# Altium PCB INA282.PcbDoc
Units mil, origin at the board's own origin, x right, y up, seen from the top; angles counter-clockwise.
Board outline 6000 x 4000 mil, 2 copper layers (Top Layer, Bottom Layer); 8 components, 13 nets, 27 pads, 4 vias.
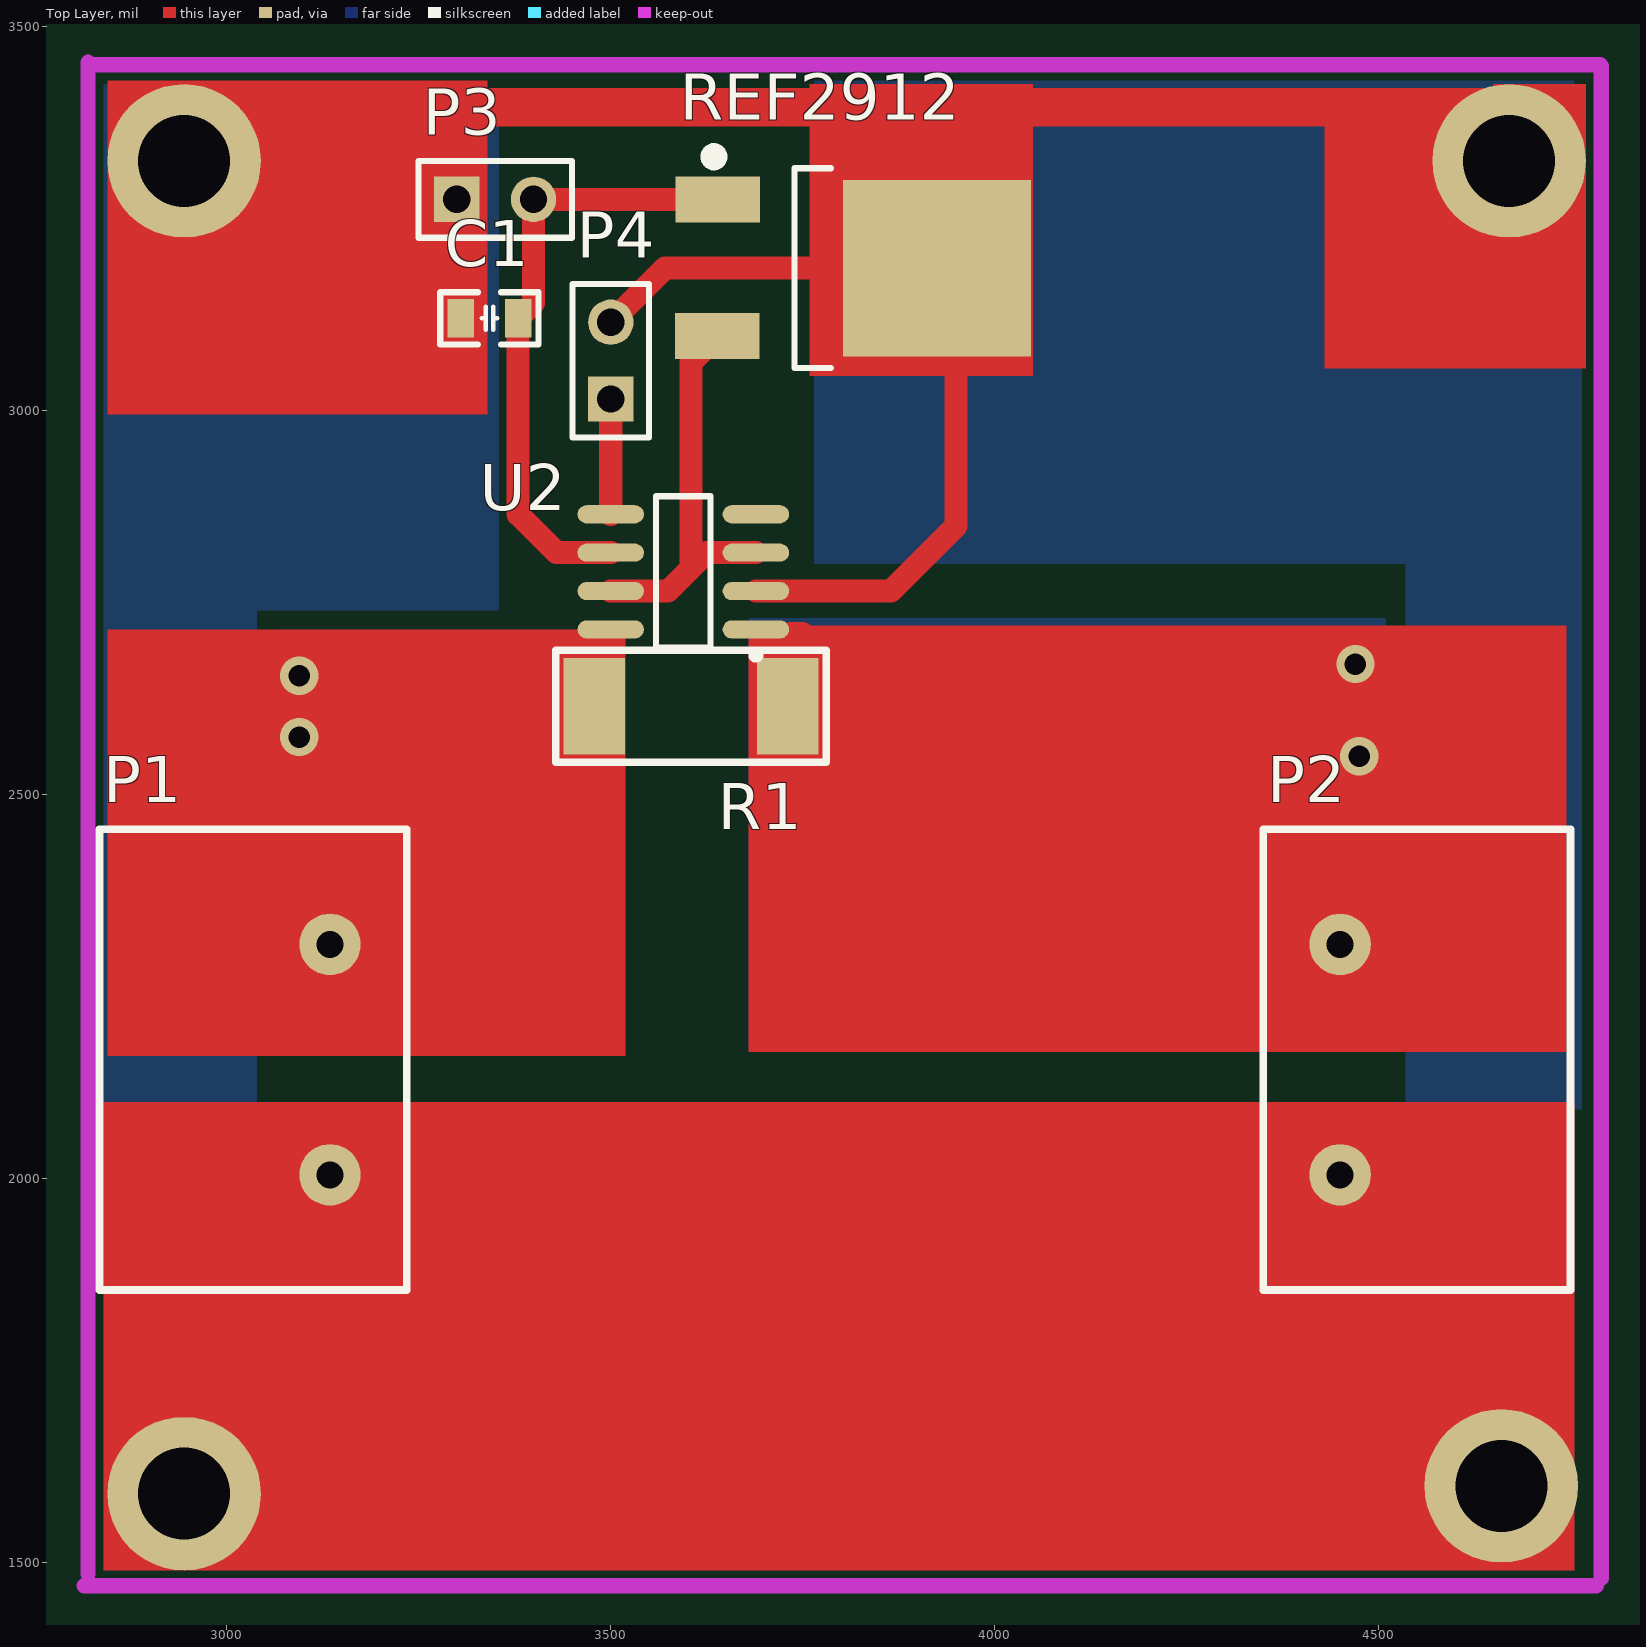
[diagram p0: Top Layer view]
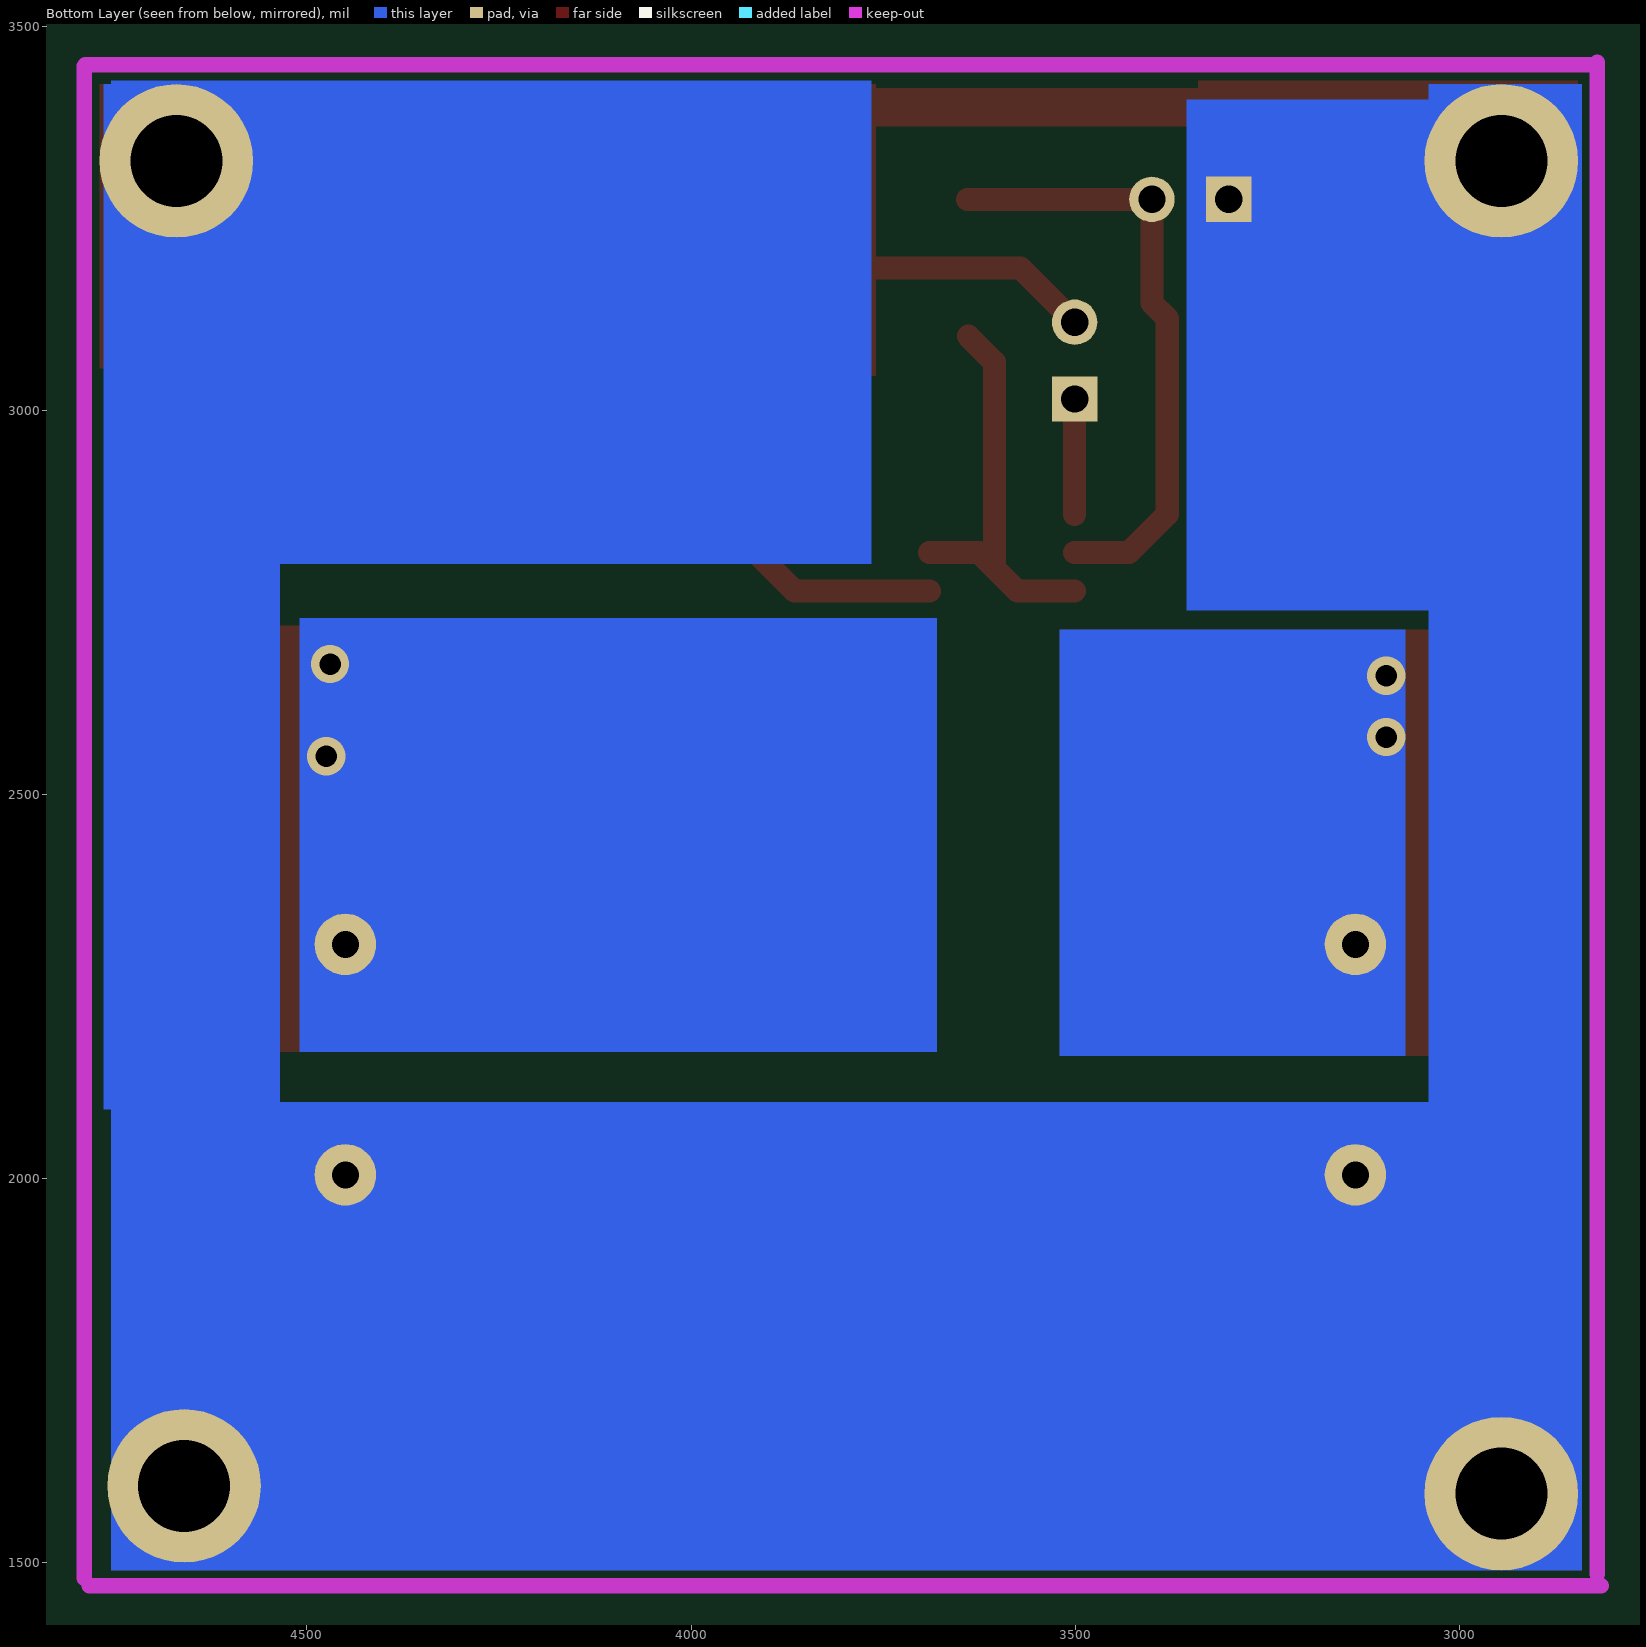
[diagram p1: Bottom Layer view, seen from below]

## Layer stack, top to bottom
Top Solder: solder mask 0.4, Solder Resist, Dk 3.5
Top Layer: signal copper 1.4
Dielectric 1: dielectric 12.6, FR-4, Dk 4.8
Bottom Layer: signal copper 1.4
Bottom Solder: solder mask 0.4, Solder Resist, Dk 3.5

## Board outline
1000,1000 7000,1000 7000,5000 1000,5000

## Design rules (kind name [scope] priority, off if disabled: settings)
Clearance [All] p1: gap=10 ignorepadtopadclearanceinfootprint=FALSE except(0: Arc-Hole Track-Hole SMDPad-Hole THPad-Hole Via-Hole Fill-Hole Poly-Hole Region-Hole Text-Hole)
PolygonConnect [All] p1: connectstyle=Relief reliefconductorwidth=10 reliefentries=4 polygonreliefangle="90 Angle" airgapwidth=10
RoutingVias [All] p1: holewidth=28 width=50 viastyle="Through Hole" minholewidth=28 minwidth=50 maxholewidth=28 maxwidth=50
SolderMaskExpansion [All] p1: expansion=4
Width [All] p1: maxlimit=100 minlimit=10 preferedwidth=50 toplayer_minwidth=30 minimp=50.000000 maximp=50.000000 favimp=50.000000
30 further rules are at their usual default settings.

## Classes and differential pairs
component class INA282: P2 P3 R1 U2

## Components (designator, comment, footprint, x,y, rotation, side; value= is the part's Value field where it differs from the comment)
C1 "Comment" "C 0805_L" 3342.6,3120 r180 top
P1 "Header 2" 2P 3035,2155 r270 top
P2 "Header 2" 2P 4550,2155 r90 top (schematic designator P1)
P3 "Header 2" HDR1X2 3300,3275 r0 top
P4 "Comment" HDR1X2 3500.51,3015 r90 top
R1 "Res2" "R 2512-HP_M" 3605,2615 r180 top value=0.1
REF2912 "Comment" TO252 3759.77,3185.45 r270 top
U2 "INA282" SO8_N 3595,2790 r180 top

## Footprints (in the part's own frame and the unit in brackets; to place one, negate y for a bottom-side part, rotate by r counter-clockwise, add the part's x,y. Pads: shape width x height; smd on the part's side, far side on the other; paste and mask are expansions set on the pad)
2P [mil]
  round 80 hole 35: 1(-150,100) 2(150,100)
  silkscreen extent -300,-200 300,200
"C 0805_L" [mil] "无极性贴片电容"
  rect 35x50 smd: 1(-37.4,0) 2(37.4,0)
  silkscreen extent -64,-34 64,34, body extent -39,-24 39,24, height 20
HDR1X2 [mm] "Connector; Header; 2 Position"
  rect 1.5x1.5 hole 0.9: 1(0,0)
  round 1.5 hole 0.9: 2(2.54,0)
  silkscreen extent -1.27,-1.27 3.81,1.27
"R 2512-HP_M" [mm] "1W高精度贴片电阻"
  rect 2.032x3.2 smd: 1(-3.2,0) 2(3.2,0)
  silkscreen extent -4.47,-1.85 4.47,1.85, body extent -3.2,-1.6 3.2,1.6, height 0.55
SO8_N [mm] "SOIC, 8-Leads, Body 4.9x3.9mm, Pitch 1.27mm, IPC Medium Density"
  oval 2.2x0.6 smd: 1(-2.4,1.905) 2(-2.4,0.635) 3(-2.4,-0.635) 4(-2.4,-1.905) 5(2.4,-1.905) 6(2.4,-0.635) 7(2.4,0.635) 8(2.4,1.905)
  silkscreen extent -2.53,-2.5 0.9,2.88, body extent -2,-2.5 2,2.5, height 1.75
TO252 [mil] "252晶体管"
  rect 60x110 smd: 1(-89.55,-119.77) 3(88.45,-120.77)
  rect 230x245 smd: 2(0,165.35)
  silkscreen extent -153,-133 130,28, body extent -128,-120 128,251, height 91

## Part data
P1 P2 P3: "Header, 2-Pin"
  P3: LatestRevisionDate=17-Jul-2002, LatestRevisionNote="Re-released for DXP Platform.", Publisher="Altium Limited"
R1: "Resistor", LatestRevisionDate=17-Jul-2002, LatestRevisionNote="Re-released for DXP Platform.", PackageDescription="Axial Device, Thru-Hole; 2 Leads; 0.4 in Pin Spacing", PackageReference=AXIAL-0.4, Published=8-Jun-2000, Publisher="Altium Limited"

## Free pads (board coordinates)
  round 200 hole 120: 2(2945,1590) 2(2945,3325) 2(4660,1600) 2(4670,3325)

## Via types
v1: diameter 50, hole 28, Top Layer to Bottom Layer, 4 vias

## Nets (pads, with @x,y where several pads share a name; then routed paths per layer and width w, separated by ;. In a path a pad name is that pad's centre, name@x,y a point inside that pad or via, vN(x,y) a via of type N, cw(c..) or ccw(c..) an arc to the next point about the centre after c; other vN are vias at no path point)
GND: C1.2 P1.2 P2.1 P3.1 P4.2 pad.2 REF2912.2 U2.2 | length 2452.7
  Top Layer w30: 3315,3025 3315,3235 ; P4.2 3570.96,3185.45 REF2912.2 ; U2.2 3865,2765 3950,2850 3950,3055 ; 4475,3325 4555,3245
  Top Layer w50: 3280,3395 4455,3395
ISI: 
NetC2_1: 
NetC3_2: 
NetC4_2: 
NetR2_2: 
NetR4_1: 
NetR5_1: 
REF: REF2912.3 U2.3 U2.7 | length 525.8
  Top Layer w30: U2.7 3575,2765 3605,2795 ; REF2912.3 3605,3063 3605,2795 ; U2.3 3625,2815 3605,2795
V: P4.1 U2.5 | length 150
  Top Layer w30: U2.5 P4.1
VCC: C1.1 P3.2 REF2912.1 U2.6 | length 799.5
  Top Layer w30: U2.6 3430,2815 3380,2865 C1.1 3400,3140 P3.2 REF2912.1
VIN: P1.1 R1.2 U2.8
  other v1: 3095,2575 3095,2655
VOUT: P2.2 R1.1 U2.1 | length 29.7
  Top Layer w30: 3734.49,2710 3750,2710 ; 4550,2605 4560,2595
  other v1: 4475,2550 4470,2670
pads on no net: U2.4

## Keep-outs
Keep-Out Layer:
  lines w20: 2815,1470 4783.5,1470 ; 2820,1485 2820,3453.5 ; 2820,3450 4788.5,3450 ; 4790,1480 4790,3448.5

## Other copper
Top Layer:
  rectangle net GND: 3759.49,3045 4050,3425
  rectangle net GND: 2845,2995 3340,3430
  rectangle net GND: 4510,3055 4680,3180
  rectangle net GND: 4430,3055 4680,3420
  rectangle net GND: 4650,3055 4770,3425
  rectangle net GND: 2840,1490 4755,2100
  rectangle net VIN: 2845,2160 3520,2715
  rectangle net VOUT: 3680,2165 4745,2720
Bottom Layer:
  rectangle net GND: 3765,2800 4755,3430
  rectangle net GND: 2985,2740 3355,3405
  rectangle net GND: 4535,2090 4765,3425
  rectangle net VOUT: 3680,2165 4510,2730
  rectangle net VIN: 3070,2160 3520,2715
  rectangle net GND: 2860,1490 4755,2100
  rectangle net GND: 2840,1490 3040,3425